# Altium PCB QSTL_M12C_BNC.PcbDoc
Units mm, origin at the board's own origin, x right, y up, seen from the top; angles counter-clockwise.
Board outline 60 x 30 mm, 4 copper layers (Top Layer, Layer 1, Layer 2, Bottom Layer), stack 0.603 mm thick; 7 components, 6 nets, 29 pads, 926 vias.
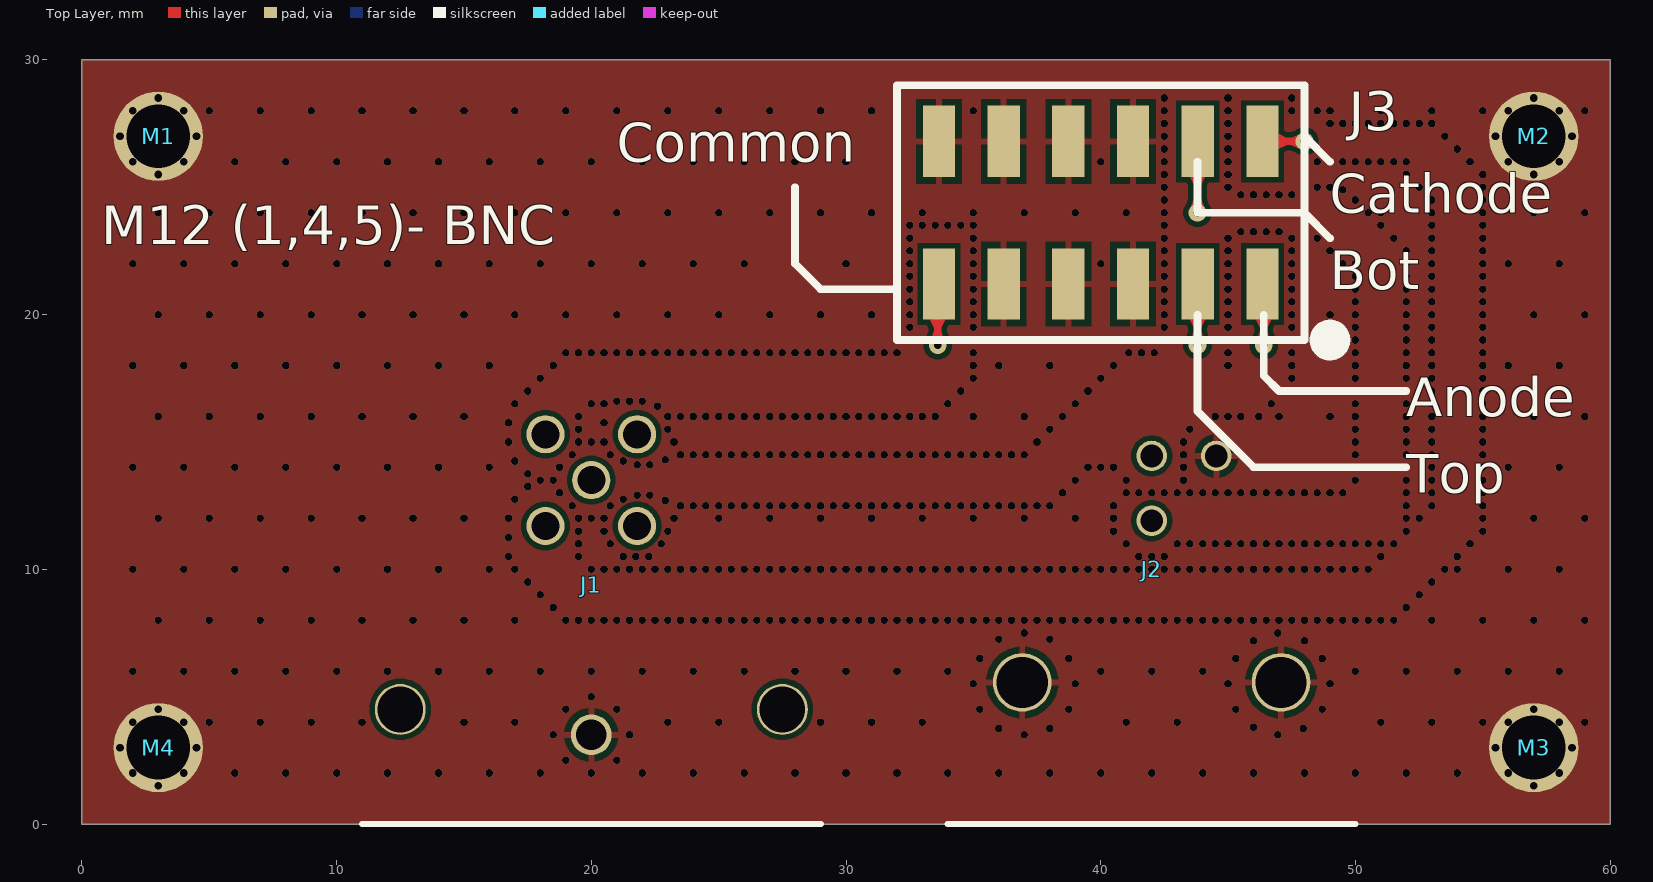
[diagram p0: Top Layer view]
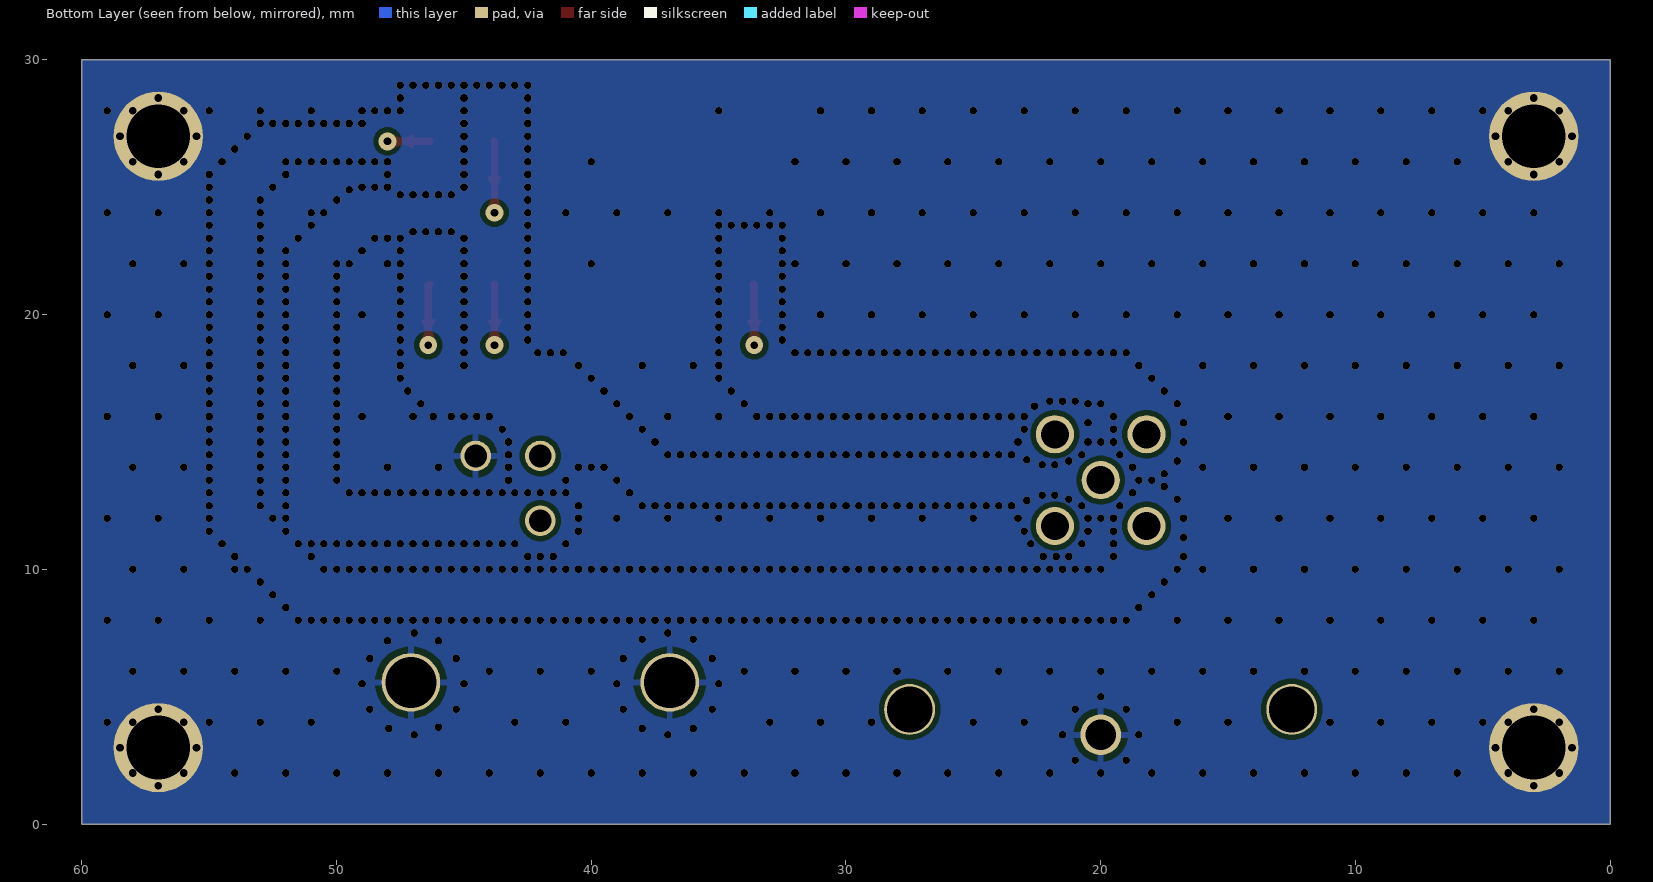
[diagram p1: Bottom Layer view, seen from below]
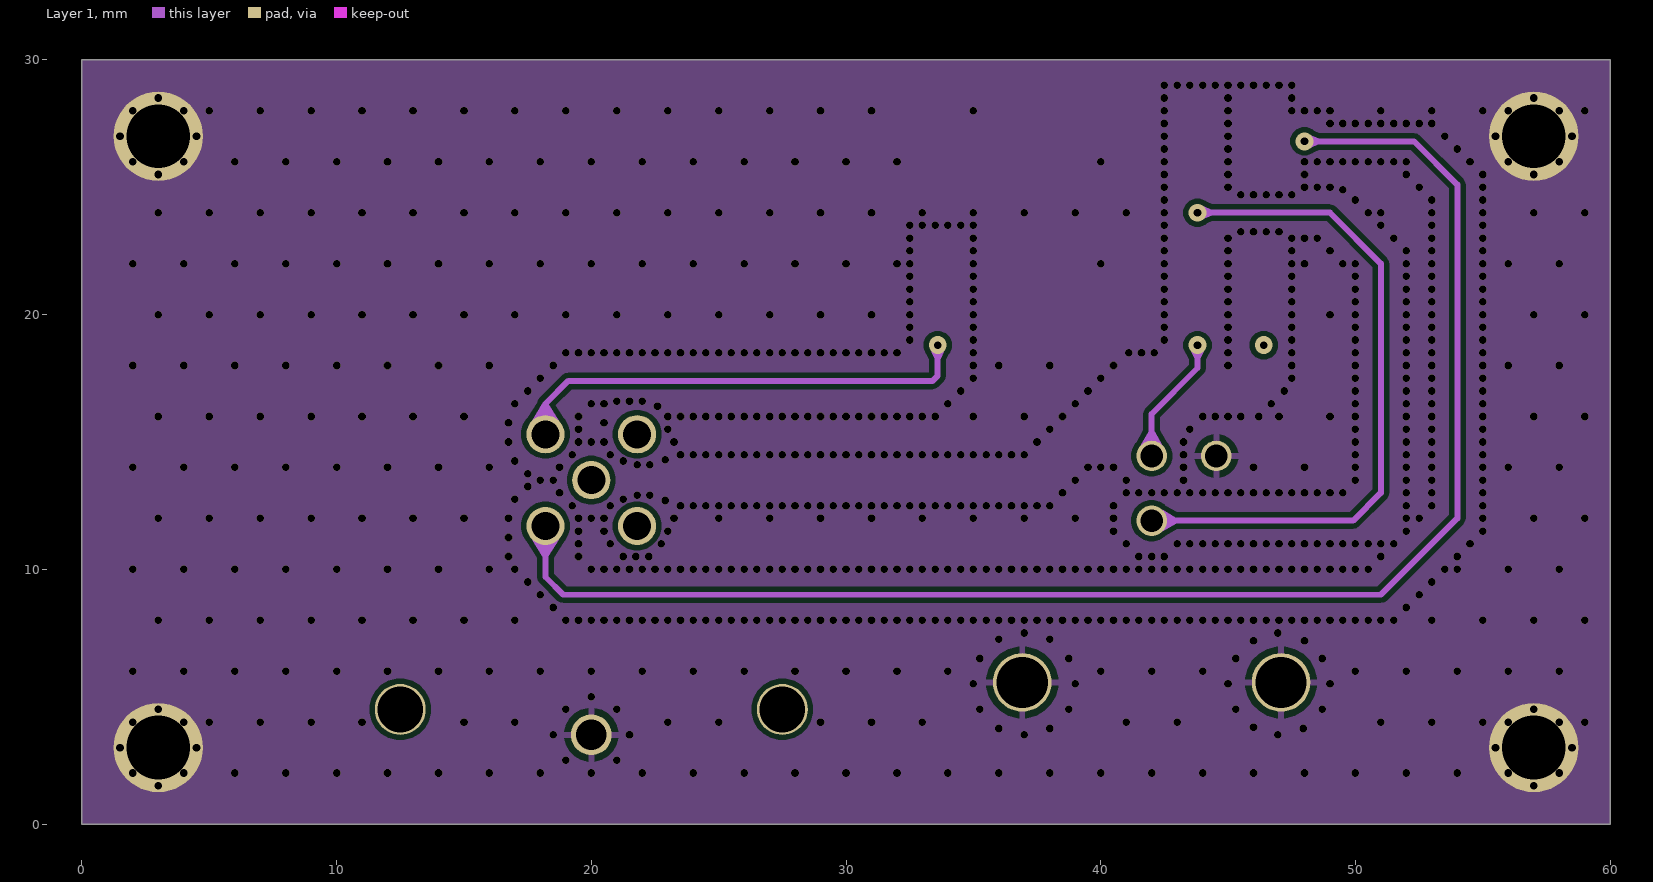
[diagram p2: Layer 1]
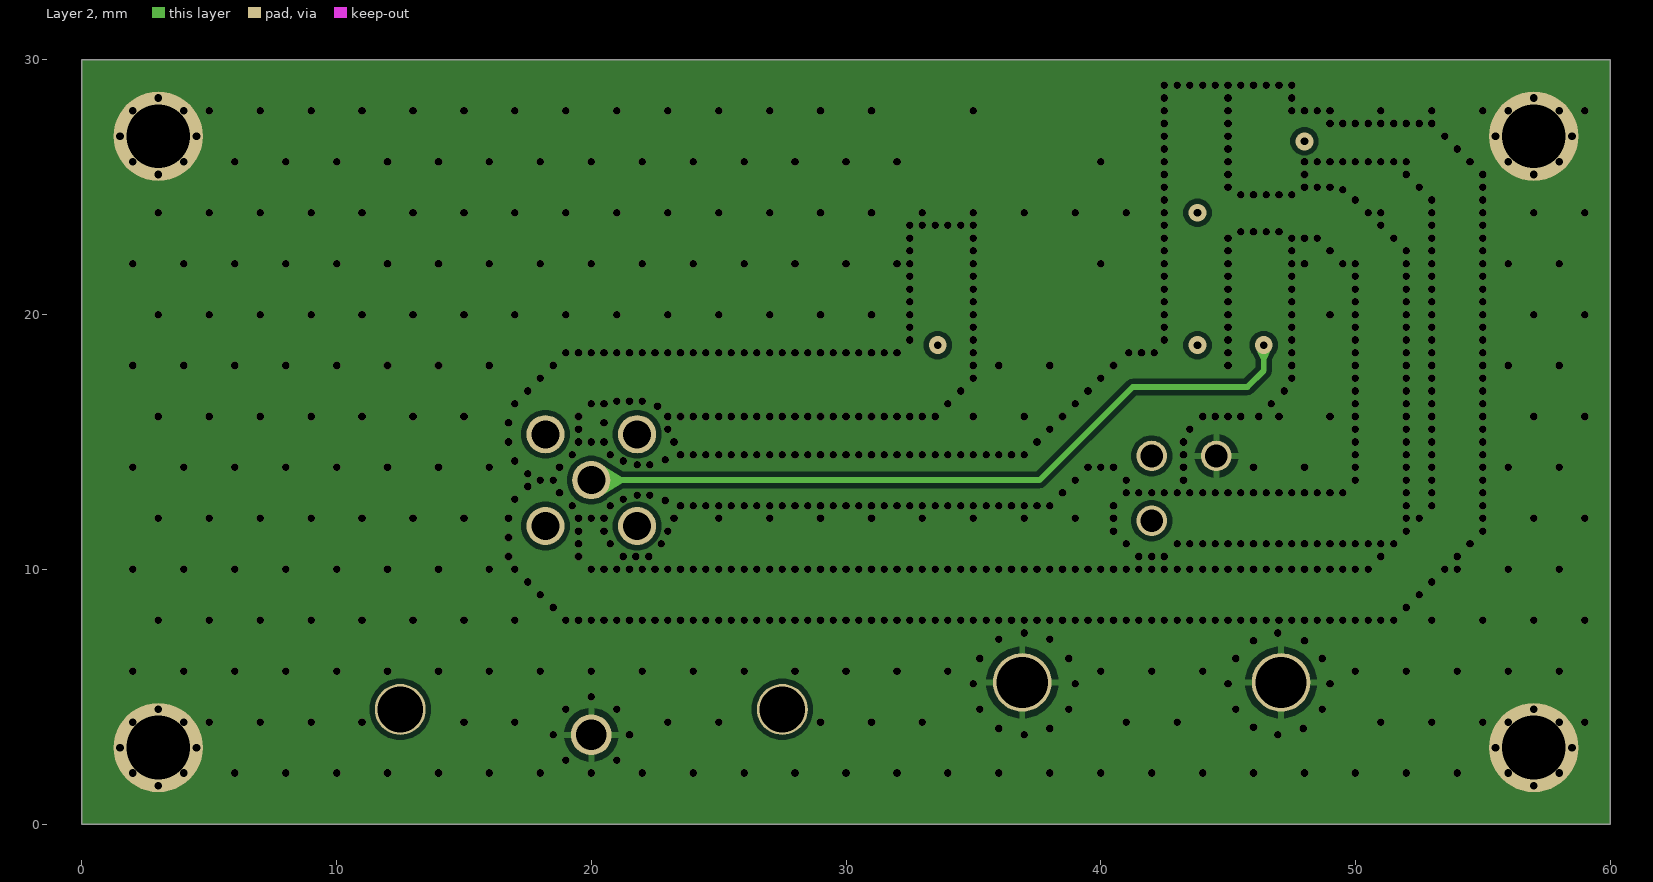
[diagram p3: Layer 2]

## Layer stack, top to bottom
Top Solder: solder mask 0.0102, Solder Resist, Dk 3.5
Top Layer: signal copper 0.0356
Dielectric 2: prepreg 0.0711, PP-006, Dk 4.1
Layer 1: signal copper 0.035
Dielectric 1: dielectric 0.32, FR-4, Dk 4.8
Layer 2: signal copper 0.035
Dielectric 3: prepreg 0.0711, PP-006, Dk 4.1
Bottom Layer: signal copper 0.0356
Bottom Solder: solder mask 0.0102, Solder Resist, Dk 3.5

## Board outline
0,0 0,30 60,30 60,0

## Design rules (kind name [scope] priority, off if disabled: settings)
Clearance [All] p1: gap=0.2 ignorepadtopadclearanceinfootprint=FALSE
PolygonConnect [All] p1: connectstyle=Relief reliefconductorwidth=0.254 reliefentries=4 polygonreliefangle="90 Angle" airgapwidth=0.254
RoutingVias [All] p1: holewidth=0.711 width=1.27 viastyle="Through Hole" minholewidth=0.711 minwidth=1.27 maxholewidth=0.711 maxwidth=1.27
SolderMaskExpansion [All] p1: expansion=0.102 istentingtop=FALSE
SupplyNets "Schematic Supply Nets" [InNet('GND')] p1: voltage=0.000
Width [All] p1: maxlimit=0.254 minlimit=0.254 preferedwidth=0.254
30 further rules are at their usual default settings.

## Components (designator, comment, footprint, x,y, rotation, side; value= is the part's Value field where it differs from the comment)
J1 "M12 5P Connector" 861-B05-213R004 20,13.5 r0 top locked
J2 "Stacked BNC" 031-6590 42,14.45 r0 top locked
J3 "12 Pin Header" PZ254-2-06-S 40,24 r180 top
M1 "M2 Hole" M2_Hole 3,27 r0 top locked
M2 "M2 Hole" M2_Hole 57,27 r0 top locked
M3 "M2 Hole" M2_Hole 57,3 r0 top locked
M4 "M2 Hole" M2_Hole 3,3 r0 top locked

## Footprints (in the part's own frame and the unit in brackets; to place one, negate y for a bottom-side part, rotate by r counter-clockwise, add the part's x,y. Pads: shape width x height; smd on the part's side, far side on the other; paste and mask are expansions set on the pad)
031-6590 [mm] "https://www.digikey.ca/en/products/detail/amphenol-rf/031-6590/4037245"
  round 1.2 hole 0.89: BOT(0,-2.54) GND(2.54,0) TOP(0,0)
  round 2.3 hole 2.01: SH1(-5.08,-8.89) SH2(5.08,-8.89)
  silkscreen extent -8,-14.45 8,-14.45, body extent -8.21,-35.27 8.21,1.23, height 32.34
861-B05-213R004 [mm] "https://www.digikey.ca/en/products/detail/norcomp-inc/861-B05-213R004/22611951?s=N4IgTCBcDaIBwDYCMBaAQgBgKwrEgzAEoYYAsIAugL5App"
  round 1.5 hole 1.1: 1(-1.8,1.8) 2(1.8,1.8) 3(1.8,-1.8) 4(-1.8,-1.8) 5(0,0)
  round 2 hole 1.8: MH1(7.5,-9) MH2(-7.5,-9)
  round 1.6 hole 1.2: SH(0,-10)
  silkscreen extent -9,-13.5 9,-13.5, body extent -10.25,-27.75 10.25,4, height 20.5
M2_Hole [mm] "M2 Hole"
  round 3.5 hole 2.5: M2(0,0)
PZ254-2-06-S [mm] "https://jlcpcb.com/partdetail/HCTL-PZ254_2_06S/C3294464"
  rect 1.27x2.8 smd: 1(-6.35,2.8) 2(-3.81,2.8) 3(-1.27,2.8) 4(1.27,2.8) 5(3.81,2.8) 6(6.35,2.8) 7(-6.35,-2.8) 8(-3.81,-2.8) 9(-1.27,-2.8) 10(1.27,-2.8) 11(3.81,-2.8) 12(6.35,-2.8)
  silkscreen extent -9.4,-5 8,5.4

## Part data
J1: library part 861-B05-213R004, "https://www.digikey.ca/en/products/detail/norcomp-inc/861-B05-213R004/22611951?s=N4IgTCBcDaIBwDYCMBaAQgBgKwrEgzAEoYYAsIAugL5A"
J2: library part 031-6590, "https://www.digikey.ca/en/products/detail/amphenol-rf/031-6590/4037245"
J3: library part PZ254-2-06-S, "https://jlcpcb.com/partdetail/HCTL-PZ254_2_06S/C3294464"
M1 M2 M3 M4: library part M2_Hole

## Via types
v1: diameter 0.3, hole 0.3, Top Layer to Bottom Layer, tented both sides, 921 vias
v2: diameter 0.7, hole 0.3, Top Layer to Bottom Layer, tented both sides, 5 vias

## Nets (pads, with @x,y where several pads share a name; then routed paths per layer and width w, separated by ;. In a path a pad name is that pad's centre, name@x,y a point inside that pad or via, vN(x,y) a via of type N, cw(c..) or ccw(c..) an arc to the next point about the centre after c; other vN are vias at no path point)
Anode: J1.5 J3.1 | length 31.6
  Top Layer w0.294: J3.1 46.4,21.15 v2(46.4,18.8)
  Layer 2 w0.232: J1.5 37.6,13.5 41.256,17.156 45.756,17.156 46.4,17.8 v2(46.4,18.8)
Cathode: J1.4 J3.7 | length 60.8
  Top Layer w0.294: J3.7 v2(48,26.8)
  Layer 1 w0.232: J1.4 18.2,9.7 18.9,9 51,9 54,12 54,25.1 52.3,26.8 v2(48,26.8)
Common: J1.1 J3.6 | length 20.7
  Top Layer w0.294: v2(33.6,18.8) 33.6,21.15 J3.6
  Layer 1 w0.232: J1.1 18.2,16.5 19.1,17.4 33.4,17.4 33.6,17.6 v2(33.6,18.8)
GND: J1.SH J2.GND J2.SH1 J2.SH2 J3.3 J3.4 J3.5 J3.9 J3.10 J3.11 J3.12 M1.M2 M2.M2 M3.M2 M4.M2
  other v1: 3,1.5 57,1.5 2,2 4,2 6,2 8,2 10,2 12,2 14,2 16,2 18,2 20,2 22,2 24,2 26,2 28,2 30,2 32,2 34,2 36,2 38,2 40,2 42,2 44,2 46,2 48,2 50,2 52,2 54,2 56,2 58,2 19,2.5 21,2.5 1.5,3 4.5,3 55.5,3 58.5,3 18.5,3.5 21.5,3.5 37,3.5 46.95,3.5 36,3.75 38,3.75 47.95,3.75 46,3.8 2,4 4,4 5,4 7,4 9,4 11,4 15,4 17,4 23,4 25,4 29,4 31,4 33,4 41,4 43,4 51,4 53,4 55,4 56,4 58,4 59,4 3,4.5 19,4.5 21,4.5 35.25,4.5 38.75,4.5 45.3,4.5 48.7,4.5 57,4.5 20,5 35,5.5 39,5.5 45,5.5 49,5.5 2,6 4,6 6,6 8,6 10,6 12,6 14,6 16,6 18,6 20,6 22,6 24,6 26,6 28,6 30,6 32,6 34,6 40,6 42,6 44,6 50,6 52,6 54,6 56,6 58,6 35.25,6.5 38.75,6.5 45.3,6.5 48.7,6.5 46,7.2 48,7.2 36,7.25 38,7.25 37,7.5 46.95,7.5 3,8 5,8 7,8 9,8 11,8 13,8 15,8 17,8 19,8 19.5,8 20,8 20.5,8 21,8 21.5,8 22,8 22.5,8 23,8 23.5,8 24,8 24.5,8 25,8 25.5,8 26,8 26.5,8 27,8 27.5,8 28,8 28.5,8 29,8 29.5,8 30,8 30.5,8 31,8 31.5,8 32,8 32.5,8 33,8 33.5,8 34,8 34.5,8 35,8 35.5,8 35.5,8 36,8 36.5,8 37,8 37.5,8 38,8 38.5,8 39,8 39.5,8 40,8 40.5,8 41,8 41.5,8 42,8 42.5,8 43,8 43.5,8 44,8 44.5,8 45,8 45.5,8 46,8 46.5,8 47,8 47.5,8 48,8 48.5,8 49,8 49.5,8 50,8 50.5,8 51,8 51.5,8 53,8 55,8 57,8 59,8 18.5,8.5 52,8.5 18,9 52.5,9 17.5,9.5 53,9.5 2,10 4,10 6,10 8,10 10,10 12,10 14,10 16,10 17,10 20,10 20.5,10 21,10 21.5,10 22,10 22.5,10 23,10 23.5,10 24,10 24.5,10 25,10 25.5,10 26,10 26.5,10 27,10 27.5,10 28,10 28.5,10 29,10 29.5,10 30,10 30.5,10 31,10 31.5,10 32,10 32.5,10 32.5,10 33,10 33.5,10 34,10 34.5,10 35,10 35.5,10 36,10 36.5,10 37,10 37.5,10 38,10 38.5,10 39,10 39.5,10 40,10 40.5,10 41,10 41.5,10 42,10 42.5,10 43,10 43.5,10 44,10 44.5,10 45,10 45.5,10 46,10 46.5,10 47,10 47.5,10 48,10 48.5,10 49,10 49.5,10 50,10 50.5,10 53.5,10 54,10 56,10 58,10 16.75,10.5 19.5,10.5 21.25,10.5 21.75,10.5 22.25,10.5 41.5,10.5 42,10.5 42.5,10.5 51,10.5 54,10.5 19.5,11 20.75,11 20.75,11 22.75,11 41,11 43,11 43.5,11 44,11 44.5,11 45,11 45.5,11 46,11 46.5,11 47,11 47.5,11 48,11 48.5,11 49,11 49.5,11 50,11 50.5,11 51,11 51.5,11 54.5,11 16.75,11.25 19.5,11.5 20.5,11.5 23,11.5 40.5,11.5 52,11.5 55,11.5 3,12 5,12 7,12 9,12 11,12 13,12 15,12 16.75,12 19.5,12 20,12 20.5,12 23.25,12 25,12 27,12 29,12 31,12 33,12 35,12 37,12 39,12 40.5,12 52,12 52.5,12 55,12 57,12 59,12 19.25,12.5 20.75,12.5 23.5,12.5 23.5,12.5 24,12.5 24.5,12.5 25,12.5 25.5,12.5 26,12.5 26.5,12.5 27,12.5 27.5,12.5 28,12.5 28.5,12.5 29,12.5 29.5,12.5 30,12.5 30.5,12.5 31,12.5 31.5,12.5 32,12.5 32.5,12.5 33,12.5 33.5,12.5 34,12.5 34.5,12.5 34.5,12.5 34.5,12.5 35,12.5 35.5,12.5 36,12.5 36.5,12.5 37,12.5 37.5,12.5 38,12.5 40.5,12.5 52,12.5 53,12.5 55,12.5 22.9,12.7 17,12.75 21.25,12.75 21.8,12.9 22.3,12.9 18.75,13 38.5,13 41,13 41.5,13 42,13 42.5,13 43,13 43.5,13 44,13 44.5,13 45,13 45.5,13 46,13 46.5,13 47,13 47.5,13 48,13 48.5,13 49,13 49.5,13 52,13 53,13 55,13 17.5,13.25 18,13.5 18.5,13.5 39,13.5 41,13.5 43.25,13.5 50,13.5 52,13.5 53,13.5 55,13.5 17.5,13.75 2,14 4,14 6,14 8,14 10,14 12,14 14,14 16,14 18.75,14 39.5,14 40,14 40.5,14 43.25,14 46,14 48,14 50,14 52,14 53,14 55,14 56,14 58,14 21.8,14.1 22.3,14.1 17,14.25 21.25,14.25 22.9,14.3 19.25,14.5 20.75,14.5 23.5,14.5 23.5,14.5 24,14.5 24.5,14.5 25,14.5 25.5,14.5 26,14.5 26.5,14.5 27,14.5 27.5,14.5 28,14.5 28.5,14.5 29,14.5 29.5,14.5 30,14.5 30.5,14.5 31,14.5 31.5,14.5 32,14.5 32.5,14.5 33,14.5 33.5,14.5 34,14.5 34.5,14.5 35,14.5 35.5,14.5 36,14.5 36.5,14.5 37,14.5 43.25,14.5 50,14.5 52,14.5 53,14.5 55,14.5 16.75,15 19.5,15 20,15 20.5,15 23.25,15 37.5,15 43.25,15 50,15 52,15 53,15 55,15 19.5,15.5 23,15.5 38,15.5 43.5,15.5 50,15.5 52,15.5 53,15.5 55,15.5 16.75,15.75 20.5,15.75 3,16 5,16 7,16 9,16 11,16 13,16 15,16 19.5,16 23,16 23.5,16 24,16 24.5,16 25,16 25.5,16 26,16 26.5,16 27,16 27.5,16 28,16 28.5,16 29,16 29.5,16 30,16 30.5,16 31,16 31.5,16 32,16 32.5,16 33,16 33.5,16 35,16 37,16 38.5,16 44,16 44.5,16 45,16 45.5,16 46.2,16 47,16 49,16 50,16 52,16 53,16 55,16 57,16 59,16 22.6,16.4 17,16.5 20,16.5 20.5,16.5 34,16.5 39,16.5 46.7,16.5 50,16.5 52,16.5 53,16.5 55,16.5 21,16.6 21.5,16.6 22,16.6 17.5,17 34.5,17 39.5,17 47.2,17 50,17 52,17 53,17 55,17 18,17.5 35,17.5 40,17.5 47.5,17.5 50,17.5 52,17.5 53,17.5 55,17.5 2,18 4,18 6,18 8,18 10,18 12,18 14,18 16,18 18.5,18 35,18 36,18 38,18 40.5,18 45,18 47.5,18 50,18 52,18 53,18 55,18 56,18 58,18 19,18.5 19.5,18.5 20,18.5 20.5,18.5 21,18.5 21.5,18.5 22,18.5 22.5,18.5 23,18.5 23.5,18.5 24,18.5 24.5,18.5 25,18.5 25.5,18.5 26,18.5 26.5,18.5 27,18.5 27.5,18.5 28,18.5 28.5,18.5 29,18.5 29.5,18.5 30,18.5 30.5,18.5 31,18.5 31.5,18.5 32,18.5 35,18.5 41.1,18.5 41.6,18.5 42.1,18.5 45,18.5 47.5,18.5 50,18.5 52,18.5 53,18.5 55,18.5 32.5,19 35,19 42.5,19 45,19 47.5,19 50,19 52,19 53,19 55,19 32.5,19.5 35,19.5 42.5,19.5 45,19.5 47.5,19.5 50,19.5 52,19.5 53,19.5 55,19.5 3,20 5,20 7,20 9,20 11,20 13,20 15,20 17,20 19,20 21,20 23,20 25,20 27,20 29,20 31,20 32.5,20 35,20 42.5,20 45,20 47.5,20 49,20 50,20 52,20 53,20 55,20 57,20 59,20 32.5,20.5 35,20.5 42.5,20.5 45,20.5 47.5,20.5 50,20.5 52,20.5 53,20.5 55,20.5 32.5,21 35,21 42.5,21 45,21 47.5,21 50,21 52,21 53,21 55,21 32.5,21.5 35,21.5 42.5,21.5 45,21.5 47.5,21.5 50,21.5 52,21.5 53,21.5 55,21.5 2,22 4,22 6,22 8,22 10,22 12,22 14,22 16,22 18,22 20,22 22,22 24,22 26,22 28,22 30,22 32,22 32.5,22 35,22 40,22 42.5,22 45,22 47.5,22 48,22 49.5,22 50,22 52,22 53,22 55,22 56,22 58,22 32.5,22.5 35,22.5 42.5,22.5 45,22.5 47.5,22.5 49,22.5 52,22.5 53,22.5 55,22.5 32.5,23 35,23 42.5,23 45,23 47.5,23 48,23 48.5,23 51.5,23 53,23 55,23 45.5,23.25 46,23.25 46.5,23.25 47,23.25 32.5,23.5 33,23.5 33.5,23.5 34,23.5 34.5,23.5 35,23.5 42.5,23.5 51,23.5 53,23.5 55,23.5 55,23.5 3,24 5,24 7,24 9,24 11,24 13,24 15,24 17,24 19,24 21,24 23,24 25,24 27,24 29,24 31,24 33,24 35,24 37,24 39,24 41,24 42.5,24 50.5,24 51,24 53,24 55,24 57,24 59,24 42.5,24.5 50,24.5 53,24.5 55,24.5 45.5,24.7 46,24.7 46.5,24.7 47,24.7 47.5,24.7 49.5,24.9 42.5,25 45,25 48,25 48.5,25 49,25 52.5,25 55,25 3,25.5 42.5,25.5 45,25.5 48,25.5 52,25.5 55,25.5 57,25.5 2,26 4,26 6,26 8,26 10,26 12,26 14,26 16,26 18,26 20,26 22,26 24,26 26,26 28,26 30,26 32,26 40,26 42.5,26 45,26 48,26 48.5,26 49,26 49.5,26 50,26 50.5,26 51,26 51.5,26 52,26 54.5,26 56,26 58,26 42.5,26.5 45,26.5 54,26.5 1.5,27 4.5,27 42.5,27 45,27 53.5,27 55.5,27 58.5,27 42.5,27.5 45,27.5 49,27.5 49.5,27.5 50,27.5 50.5,27.5 51,27.5 51.5,27.5 52,27.5 52.5,27.5 53,27.5 2,28 4,28 5,28 7,28 9,28 11,28 13,28 15,28 17,28 19,28 21,28 23,28 25,28 27,28 29,28 31,28 35,28 42.5,28 45,28 47.5,28 48,28 48.5,28 49,28 51,28 53,28 55,28 56,28 58,28 59,28 3,28.5 42.5,28.5 45,28.5 47.5,28.5 57,28.5 42.5,29 43,29 43.5,29 44,29 44.5,29 45,29 45.5,29 46,29 46.5,29 47,29 47.5,29
Top1: J2.TOP J3.2 | length 7.5
  Top Layer w0.294: v2(43.8,18.8) 43.8,21.19 J3.2
  Layer 1 w0.232: J2.TOP 42,16.1 43.8,17.9 v2(43.8,18.8)
Top2: J2.BOT J3.8 | length 29.3
  Top Layer w0.294: v2(43.8,24) 43.8,26.79 J3.8
  Layer 1 w0.232: J2.BOT 49.91,11.91 51,13 51,22 49,24 v2(43.8,24)
pads on no net: J1.2 J1.3 J1.MH1 J1.MH2

## Polygon pours and split planes (outlines as drawn)
GND on Bottom Layer "GND_L01_P-001" (solid, pour order 1): 0,0 60,0 60,30 0,30
GND on Top Layer "GND_L01_P-001" (solid, remove dead copper, pour order 0): 0,0 60,0 60,30 0,30
GND on Layer 2 "GND_L01_P-001" (solid, pour order 2): 0,0 60,0 60,30 0,30
GND on Layer 1 "GND_L01_P-001" (solid, pour order 3): 0,0 60,0 60,30 0,30

## Silkscreen, mask and mechanical layers (free items; w line width, h text height)
Top Overlay:
  lines w0.3: 28,25 28,22 29,21 32,21 ; 43.8,20 43.8,19.8 43.8,16.2 46,14 52,14 ; 43.8,26 43.8,25.8 43.8,24 48,24 49,23 ; 46.4,20 46.4,17.6 47,17 52,17 ; 48,27 49,26
  text "Common" at 21,26 h1.52
  text "Cathode" at 49,24 h1.52
  text "M12 (1,4,5)- BNC" at 0.754,22.762 h1.52
  text "Bot" at 49,21 h1.52
  text "Anode" at 52,16 h1.52
  text "Top" at 52,13 h1.52
Mechanical 1:
  the board outline again, w0.3